# Altium PCB PSoC6-Cardiac-PCB.PcbDoc (part 2 of 2)
Units mm, origin at the board's own origin, x right, y up, seen from the top; angles counter-clockwise.
Board outline 36.98 x 46.23 mm, 4 copper layers (Top Layer, Layer 1, Layer 2, Bottom Layer), stack 1.058 mm thick; 58 components, 40 nets, 282 pads, 88 vias.
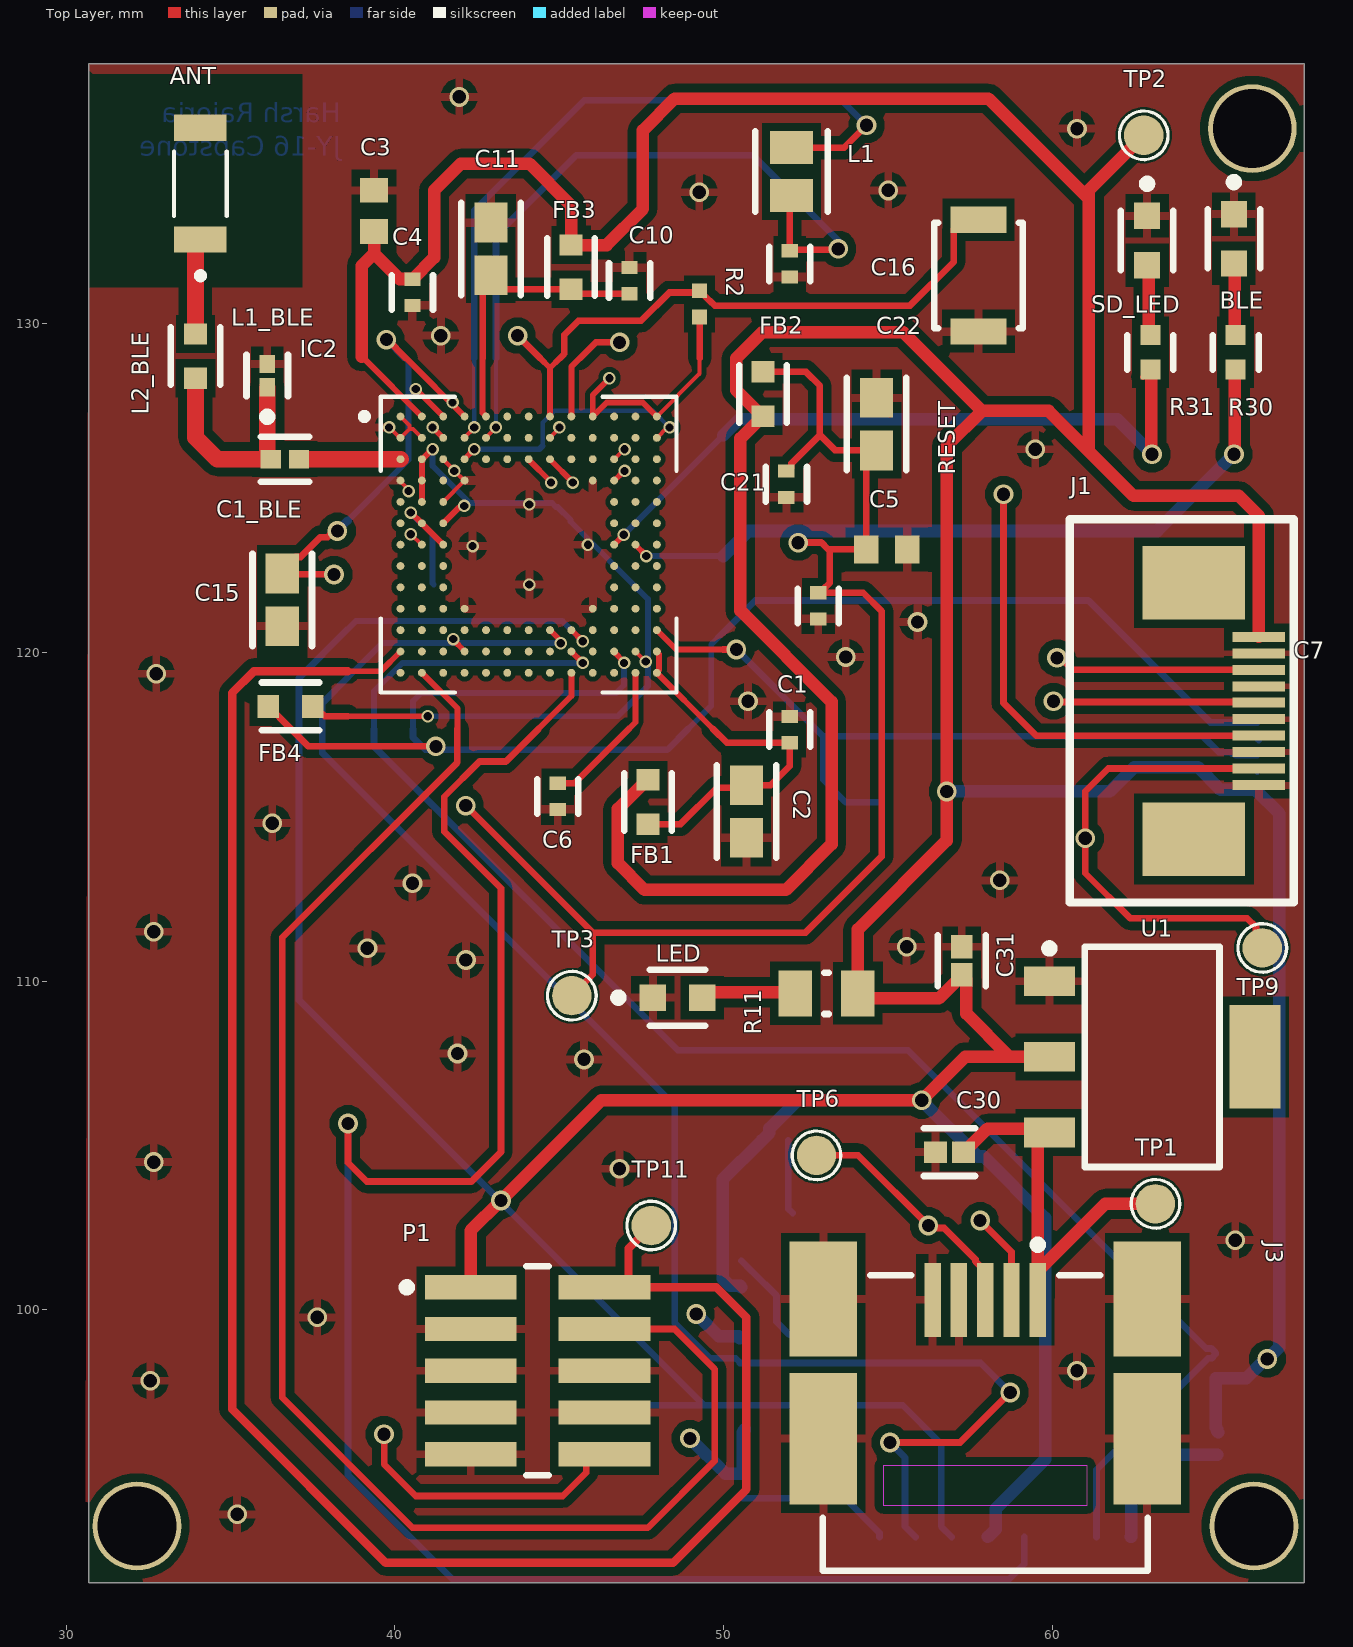
[diagram p0: Top Layer view]

## Via types
v1: diameter 0.6, hole 0.406, Top Layer to Bottom Layer, 26 vias
v2: diameter 0.6, hole 0.4, Top Layer to Bottom Layer, 14 vias
v3: diameter 0.6, hole 0.4, Top Layer to Layer 2, 14 vias
v4: diameter 0.38, hole 0.25, Top Layer to Bottom Layer, tented both sides, 13 vias
v5: diameter 0.38, hole 0.25, Top Layer to Layer 2, tented both sides, 10 vias
v6: diameter 0.38, hole 0.25, Top Layer to Layer 1, tented both sides, 10 vias
v7: diameter 0.6, hole 0.406, Top Layer to Layer 1, 1 vias

## Nets (pads, with @x,y where several pads share a name; then routed paths per layer and width w, separated by ;. In a path a pad name is that pad's centre, name@x,y a point inside that pad or via, vN(x,y) a via of type N, cw(c..) or ccw(c..) an arc to the next point about the centre after c; other vN are vias at no path point) (continued)
VDDR: (continued)
  Top Layer w0.203: FB4.1 37.505,118.339 37.728,118.116 37.817,118.116 37.873,118.06 38.568,118.06
  Bottom Layer w0.178: v4(41,118.06) 46.787,118.06 47.701,118.974 47.701,121.629 45.343,123.987 45.343,124.037 44.957,124.423 C12.1 44.781,124.549 C13.1 42.278,124.549 41.148,125.679 v4(41.148,126.187)
VRef: C15.1 FB4.2 IC2.A4 IC2.F3 | length 37.5
  Top Layer w0.178: 40.345,128.951 42.114,127.182 IC2.A4 42.124,127.199 41.758,127.565 v5(41.758,127.61) ; IC2.F3 41.963,124.421 42.075,124.421 v5(42.113,124.46)
  Top Layer w0.203: FB4.2 36.83,117.689 37.374,117.145 v3(41.25,117.145) ; v3(38.151,122.377) 36.605,122.377 36.605,122.533 36.98,122.909 37.136,122.909 37.74,123.512 37.959,123.512 38.145,123.698 v2(38.252,123.698) ; v2(39.745,129.521) 39.775,129.521 40.345,128.951
  Layer 2 w0.178: 38.568,122.377 40.025,122.377 42.108,124.46 v5(42.113,124.46) ; v5(41.758,127.61) 41.758,125.578 42.672,124.663 42.672,118.567 41.778,117.674
  Layer 2 w0.203: v3(38.151,122.377) 38.568,122.377
  Layer 2 w0.254: v3(41.25,117.145) 41.778,117.674
  Bottom Layer w0.178: 38.568,124.013 40.419,125.865 40.419,128.846 40.314,128.951
  Bottom Layer w0.203: v2(39.745,129.521) 40.314,128.951
  Bottom Layer w0.254: v2(38.252,123.698) 38.568,124.013
pads on no net: ANT.2 IC2.A6 IC2.A7 IC2.A11 IC2.A12 IC2.B6 IC2.B7 IC2.B9 IC2.B10 IC2.B11 IC2.B12 IC2.C5 IC2.C6 IC2.C9 IC2.C10 IC2.C12 IC2.C13 IC2.D3 IC2.D12 IC2.D13 IC2.E1 IC2.E11 IC2.E12 IC2.E13 IC2.F1 IC2.F11 IC2.F12 IC2.F13 IC2.G1 IC2.G13 IC2.H1 IC2.H2 IC2.H3 IC2.H11 IC2.H12 IC2.H13 IC2.J1 IC2.J2 IC2.J3 IC2.J11 IC2.J12 IC2.J13 IC2.K1 IC2.K2 IC2.K3 IC2.K11 IC2.K12 IC2.K13 IC2.L1 IC2.L2 IC2.L3 IC2.L4 IC2.L5 IC2.L6 IC2.L7 IC2.L10 IC2.L11 IC2.L12 IC2.M2 IC2.M3 IC2.M5 IC2.M6 IC2.M7 IC2.M8 IC2.M10 IC2.N1 IC2.N3 IC2.N4 IC2.N5 IC2.N6 IC2.N7 IC2.N8 IC2.N10 IC2.N11 J1.G1 J1.G2 J2.G1 J2.G2 SD.13 SD.14 U1.4
copper on no net: | length 0
  Top Layer w0.127: 42.774,120.668 42.774,120.682
  Top Layer w0.178: 42.774,120.668 42.774,120.682

## Polygon pours and split planes (outlines as drawn)
GND on Bottom Layer "GND_Bottom" (solid, pour order 1): 30.683,91.694 67.666,91.694 67.666,137.922 30.683,137.922
GND on Layer 1 "GND_L01" (solid, pour order 0): 30.683,137.922 67.666,137.922 67.666,91.846 30.683,91.846
GND on Layer 2 "GND_L01" (solid, pour order 3): 30.682,137.922 67.767,137.922 67.767,91.643 30.634,91.643
GND on Top Layer "GND_L01" (solid, pour order 2): 30.681,137.922 67.666,137.922 67.666,91.745 67.615,91.694 30.585,91.694

## Other copper
Top Layer:
  pour cut-out: 30.693,137.605 37.193,137.605 37.193,131.105 30.693,131.105
Bottom Layer:
  text "Harsh Rajoria / JY-16 Capstone" at 38.354,134.925 h1.02

## Silkscreen, mask and mechanical layers (free items; w line width, h text height)
Mechanical 1:
  the board outline again, w0

## Text inside footprints (layer, text, board x,y; h text height)
J2: Mechanical 1 "J1" at 63.754,117.626 h0.51 r270
J3: Mechanical 1 "PCB EDGE" at 45.265,92.685 h0.51